# EAGLE board BuckConvertor (EAGLE 9.6.2)
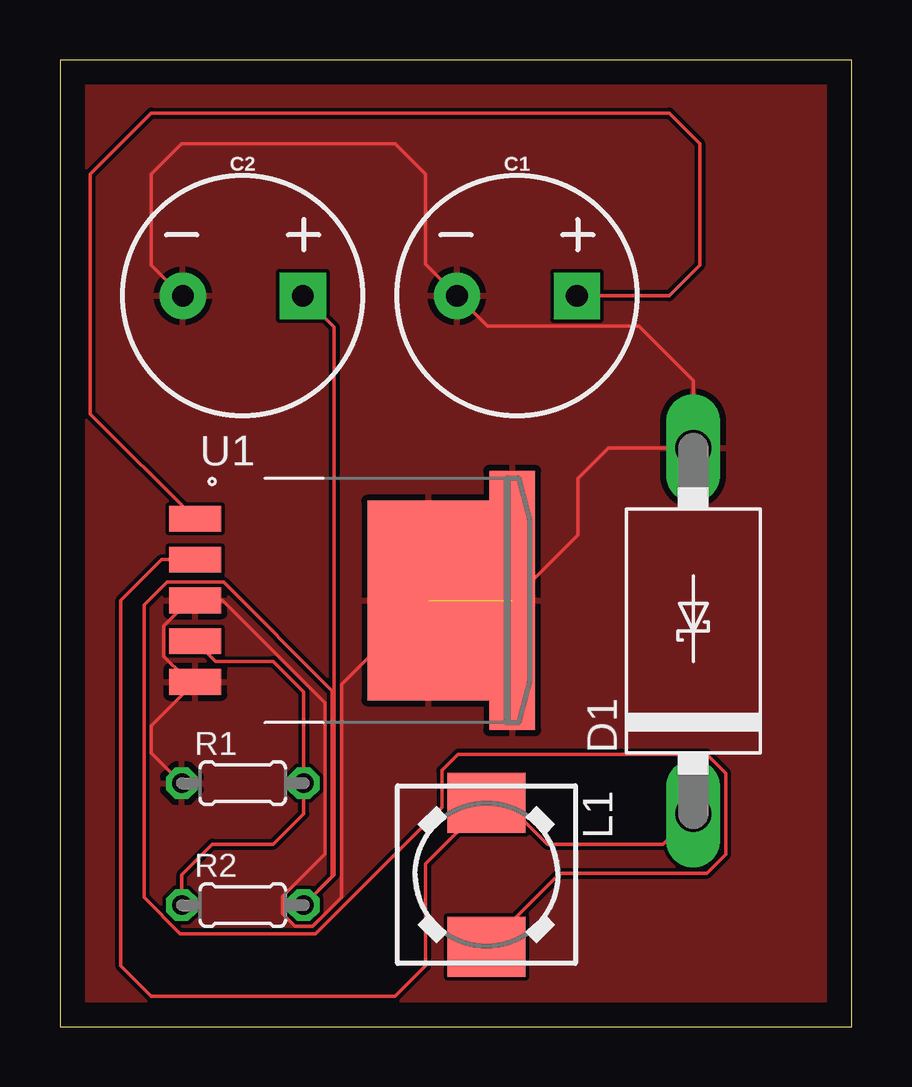
[diagram p0: board, top side]
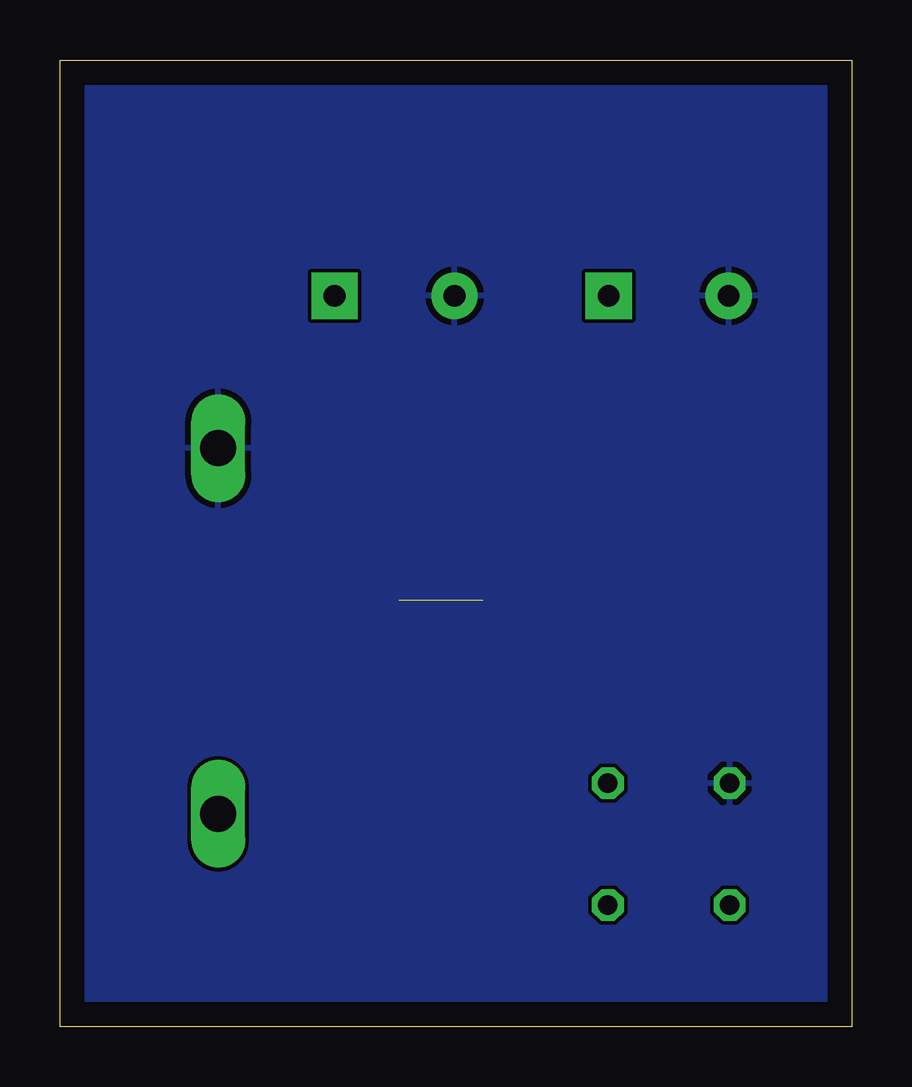
[diagram p1: board, bottom side, seen from below]

Size 33 x 40.31 mm. Coordinates in mm from the lower left corner, seen from the top.
Outline: 0,0 33,0 33,40.31 0,40.31 0,0
Copper layers (1*16): Top 0.035mm / dielectric 1.5mm / Bottom 0.035mm
Design rules "default": minimum track width 6mil, minimum drill 0.35mm, track to track 6mil, track to pad 6mil, pad to pad 6mil, via to via 6mil, smd to smd 6mil, copper to edge 40mil, drill to drill 6mil, minimum pad ring 10mil, minimum via ring 8mil, stop-mask expansion 4mil, vias tented up to drill 0mil, thermal gap 10mil

## Footprints (pad centres in the part's own frame; a part is rotated, then mirrored left to right if it is on the bottom)
CPOL-RADIAL-5MM-10MM = drill 0.9 pad 1.93 square: + 2.5,0 | drill 0.9 pad 1.93: - -2.5,0
DIOB_MBR360G = drill 1.499 long: A 7.62,0.271; C -7.62,0.271
DR73 = smd 2.5 x 3.25: 1 -3,0; 2 3,0
0204/5 = drill 0.813 octagon: 1 -2.54,0; 2 2.54,0
REG_LM2576HVS-ADJ/NOPB = smd 2.16 x 1.07: 1 -3.25,3.4; 2 -3.25,1.7; 3 -3.25,0; 4 -3.25,-1.7; 5 -3.25,-3.4 | smd 5.08 x 8.33: 6 6.47,0 | smd 1.91 x 10.8: 7 9.965,0

## Placement (x,y rotation side)
C1  100uF  [CPOL-RADIAL-5MM-10MM]  19.05,30.48 0 top
C2  1000uF  [CPOL-RADIAL-5MM-10MM]  7.62,30.48 0 top
D1  MBR360G  [DIOB_MBR360G]  26.67,16.51 90 top
L1  100uH  [DR73]  17.78,6.35 270 top
R1  2k  [0204/5]  7.62,10.16 0 top
R2  6.12k  [0204/5]  7.62,5.08 0 top
U1  LM2576HVS-ADJ/NOPB  [REG_LM2576HVS-ADJ/NOPB]  8.89,17.78 0 top

## Library data of the parts
C1 C2 = SparkFun-Capacitors; PROD_ID: CAP-09538
D1 = MBR360G; AVAILABILITY: Unavailable; DESCRIPTION: Diode Schottky 60V 3A Through Hole DO-201AD; DIGIKEY-PURCHASE-URL: https://snapeda.com/shop?store=DigiKey&id=53063; MF: ON Semiconductor; MP: MBR360G; PACKAGE: DO-201 ON Semiconductor; PRICE: None
L1 = inductors; SPICEPREFIX: L
R1 R2 = rcl; SPICEPREFIX: R
U1 = LM2576HVS-ADJ_NOPB; AVAILABILITY: Unavailable; DESCRIPTION: Buck Switching Regulator IC Positive Adjustable 1.23V 1 Output 3A TO-263-6, D²Pak (5 Leads + Tab), TO-263BA; DIGIKEY-PURCHASE-URL: https://snapeda.com/shop?store=DigiKey&id=213619; MF: Texas Instruments; MP: LM2576HVS-ADJ/NOPB; PACKAGE: TO-263-5 Texas Instruments; PRICE: None

## Nets
GND: C1.- C2.- D1.A R1.1 U1.3 U1.5 U1.6 U1.7
N$2: D1.C L1.1 U1.2
N$4: R1.2 R2.1 U1.4
VIN: C1.+ U1.1
VOUT: C2.+ L1.2 R2.2

## Tracks (layer width: path | path; a pad name or v marks a point on that pad's centre or on a via)
GND  (1 unrouted)
  Top 0.152: U1.6 15.34,17.88 11.73,14.28 11.73,5.4 10.53,4.19 9.79,4.19 9.27,4.71 9.27,5.45 11.05,7.23 11.05,13.51 6.78,17.78 U1.3 5.4,17.78 4.33,16.71 4.33,15.45 5.16,14.63 5.16,13.89 | C2.- 5.08,30.48 3.81,31.75 3.81,35.56 5.08,36.83 13.97,36.83 15.24,35.56 15.24,31.79 C1.- 17.82,29.21 24.13,29.21 26.4,26.94 D1.A 22.86,24.13 21.59,22.86 21.59,20.52 U1.7 | U1.5 5.16,13.89 | 5.16,13.89 3.81,12.55 3.81,11.43 R1.1
  Bottom 0.152: 5.03,10.16 R1.1
  pour Top: -1.27,41.91 34.29,41.91 34.29,-1.27 -1.27,-1.27
  pour Bottom: -1.27,41.91 34.29,41.91 34.29,-1.27 -1.27,-1.27
N$2
  Top 0.152: D1.C 25.13,7.62 20.32,7.62 18.59,9.35 L1.1 15.24,6.81 15.24,2.54 13.97,1.27 3.81,1.27 2.54,2.54 2.54,17.78 4.24,19.48 U1.2
N$4
  Top 0.152: 10.06,10.16 R1.2 | R2.1 5.08,6.35 6.35,7.62 8.89,7.62 10.16,8.89 R1.2 | U1.4 6.48,15.24 8.89,15.24 10.16,13.97 R1.2
VIN
  Top 0.152: U1.1 5.59,21.23 1.27,25.55 1.27,35.56 3.81,38.1 25.4,38.1 26.67,36.83 26.67,31.75 25.4,30.48 C1.+
  Bottom 0.152: C1.+ 21.59,30.44
VOUT
  Top 0.152: C2.+ 11.43,29.17 11.43,6.35 R2.2 11.35,6.27 11.35,14 6.82,18.54 4.46,18.54 3.5,17.58 3.5,5.4 5.02,3.89 10.65,3.89 15.93,9.16 15.93,10.7 16.6,11.37 26.96,11.37 27.75,10.57 27.75,7.21 26.96,6.41 20.84,6.41 L1.2